# Altium PCB BLE_PCB_Rev1.PcbDoc (part 2 of 2)
Units mm, origin at the board's own origin, x right, y up, seen from the top; angles counter-clockwise.
Board outline 81.41 x 40.9 mm, 2 copper layers (Top Layer, Bottom Layer), stack 1.57 mm thick; 31 components, 55 nets, 156 pads, 14 vias.
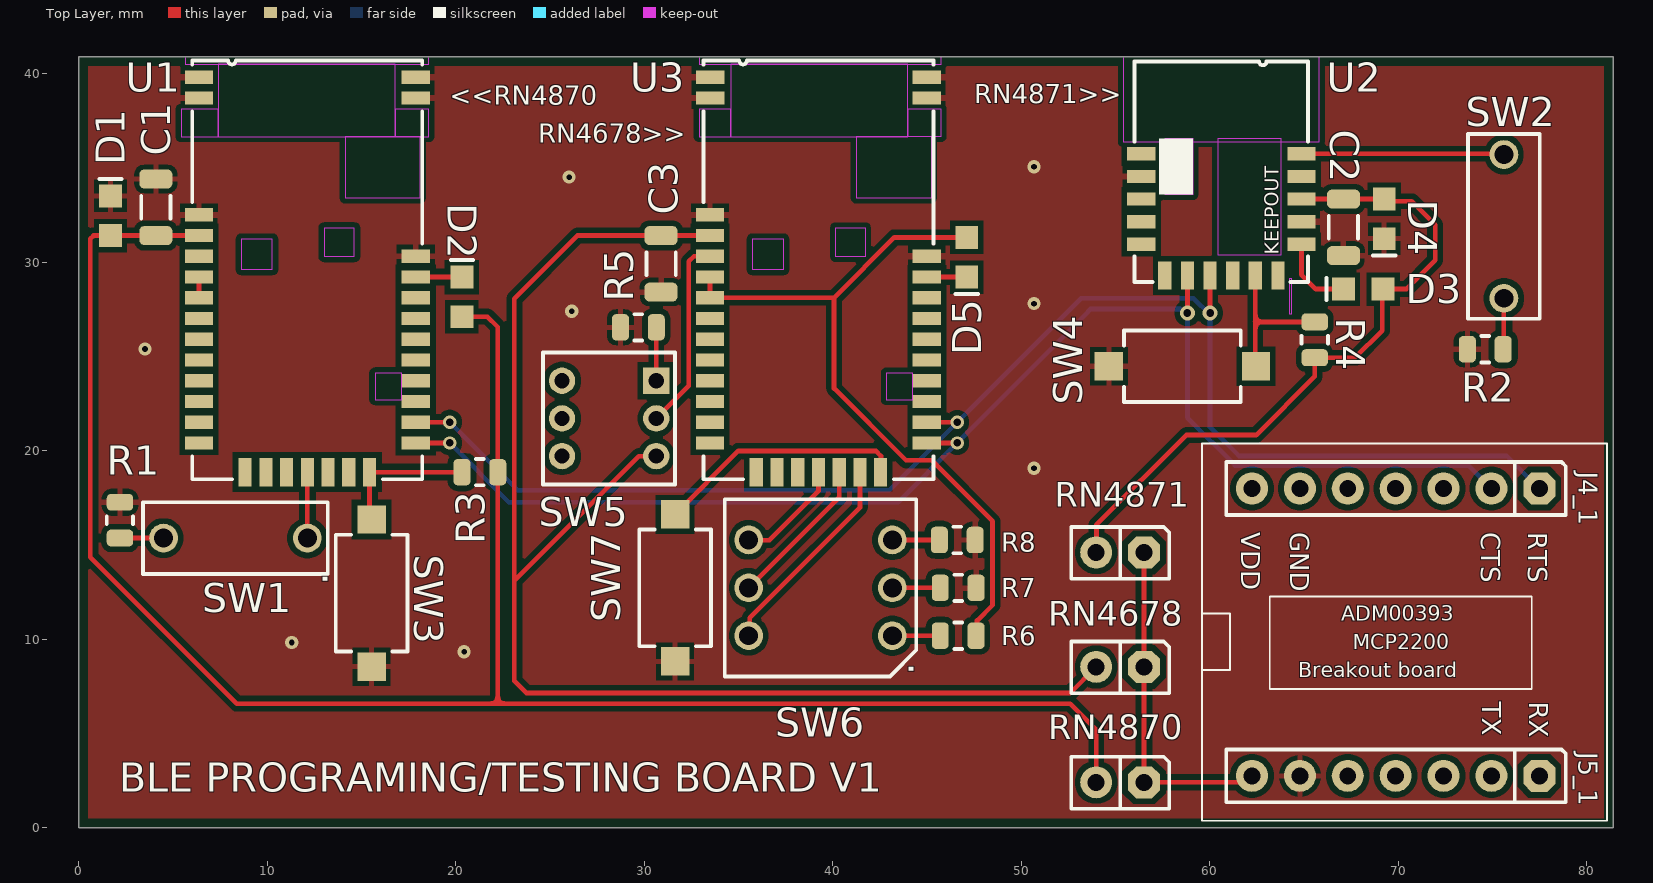
[diagram p0: Top Layer view]

## Silkscreen, mask and mechanical layers (free items; w line width, h text height) (continued)
TITLE MIRROR (M17): (continued)
  text "10mm" at -2.2,-175.396 h0.7
  text "REV:" at 5.05,-175.546 h1.14
  text "PCB FILE NAME:" at 63.8,-175.546 h1.14
  text "400mil" at -2.1,-177.096 h0.7
  text "Chandler, AZ  85224" at 94.82,-177.296 h1.78
  text "'.PCB_FILE_NAME_NO_PATH'" at 63.8,-177.546 h1.14
  text "6" at 10.234,-181.518 h1.78
  text "5" at 73.861,-181.518 h1.78
  text "4" at 137.336,-181.518 h1.78
  text "3" at 201.005,-181.518 h1.78
  text "2" at 264.234,-181.518 h1.78
  text "1" at 327.624,-181.518 h1.78

## Dimensions
81.407,0 to 81.407,40.904 on FAB (M4)
0,0 to 81.407,40.904 on FAB (M4)

## Text inside footprints (layer, text, board x,y; h text height)
C1: Top Courtyard "C" at 4.397,32.712 h0.6 r90
C2: Top Courtyard "C" at 66.789,32.048 h0.6 r270
C3: Top Courtyard "C" at 31.194,29.712 h0.6 r90
SW1: Top Assembly "1" at 12.621,15.267 h1 r180
SW2: Top Assembly "1" at 75.698,36.198 h1 r270
SW5: Top Assembly "1" at 30.299,24.76 h1 r270
SW6: Top Assembly "1" at 41.637,9.933 h1 r90
U2: Top Overlay "KEEPOUT" at 63.912,30.398 h1.27 r90